# Altium PCB Memory_Proto.PcbDoc
Units mil, origin at the board's own origin, x right, y up, seen from the top; angles counter-clockwise.
Board outline 5200 x 2300 mil, 2 copper layers (Top Layer, Bottom Layer), stack 61.756 mil thick; 3 components, 38 nets, 1008 pads, 0 vias.
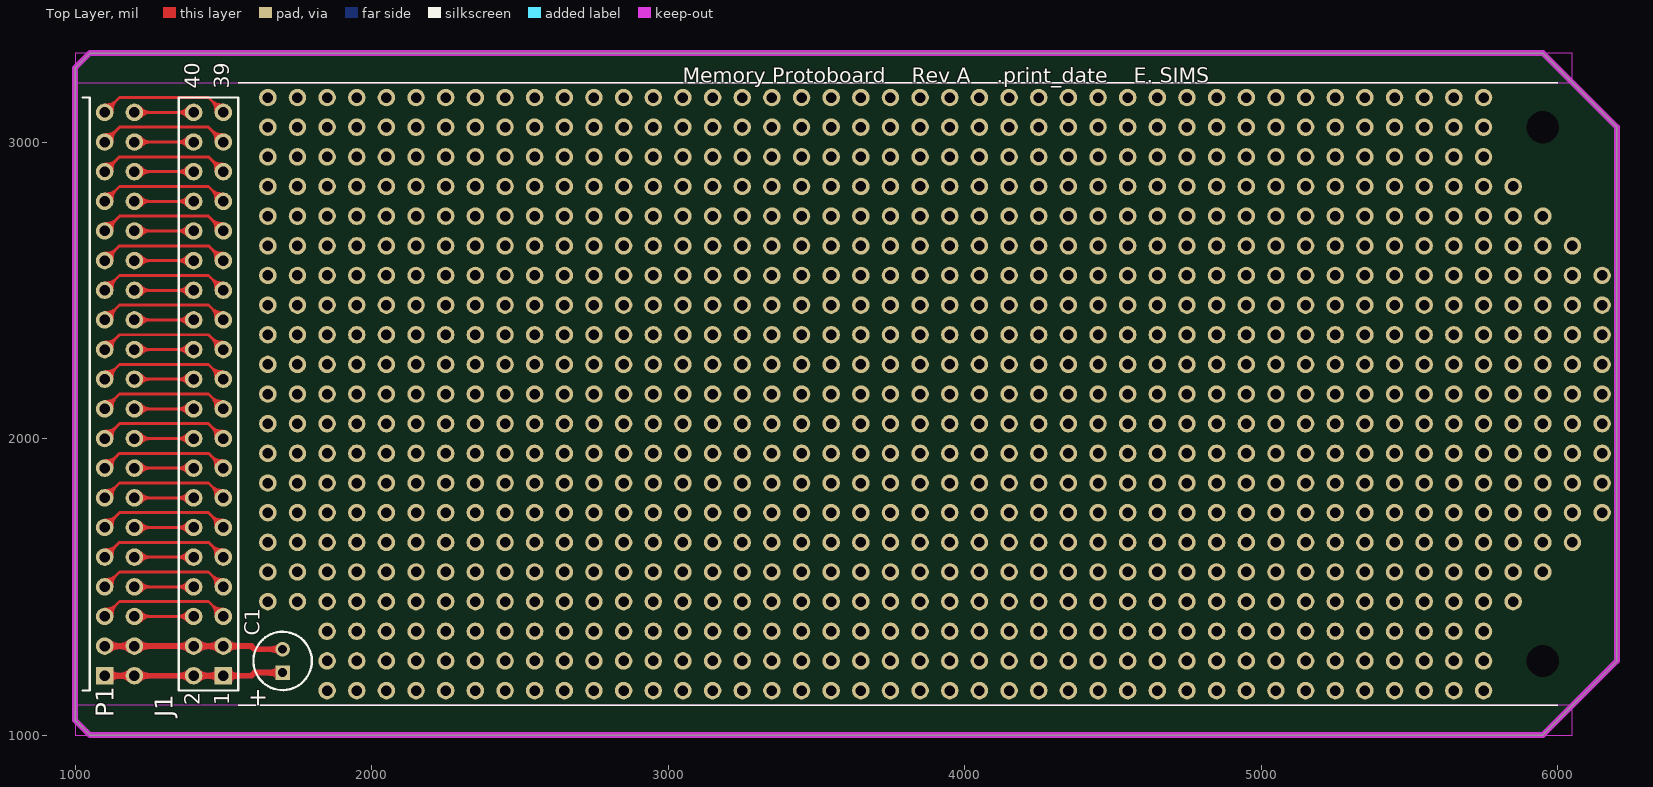
[diagram p0: Top Layer view]
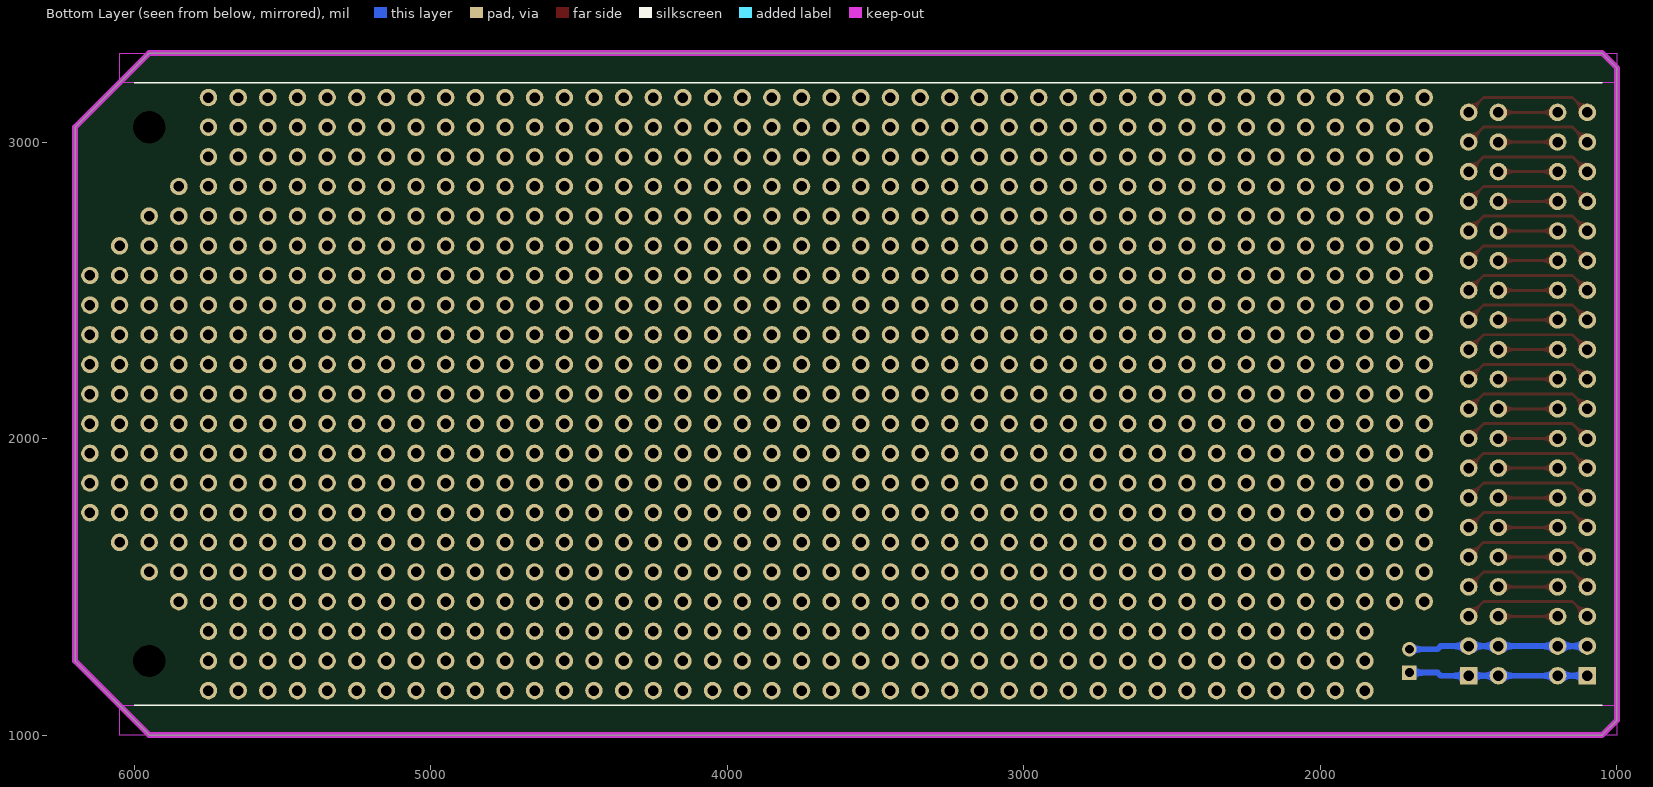
[diagram p1: Bottom Layer view, seen from below]

## Layer stack, top to bottom
Top Solder: solder mask 1, SM-001, Dk 4
Top Layer: signal copper 1.378
Dielectric 1: core 59, Core-043, Dk 4.3
Bottom Layer: signal copper 1.378
Bottom Solder: solder mask 1, SM-001, Dk 4

## Board outline
6200,3050 5950,3300 1050,3300 1000,3250 1000,1050 1050,1000 5950,1000 6200,1250

## Design rules (kind name [scope] priority, off if disabled: settings)
Clearance [All] p1: gap=10 ignorepadtopadclearanceinfootprint=FALSE except(0: Arc-Hole Track-Hole SMDPad-Hole THPad-Hole Via-Hole Fill-Hole Poly-Hole Region-Hole Text-Hole)
HoleSize [All] p1: absolutevalues=TRUE maxlimit=150 minlimit=10 maxpercent=80.000 minpercent=20.000
PolygonConnect [All] p1: connectstyle=Relief reliefconductorwidth=10 reliefentries=4 polygonreliefangle="90 Angle" airgapwidth=10
RoutingVias "Schematic Routing Via Style" [InNetClass('PWR')] p1: holewidth=20 width=35 viastyle="Through Hole" minholewidth=20 minwidth=35 maxholewidth=20 maxwidth=50
RoutingVias [InNet('No Net')] p2: holewidth=35.43 width=59.05 viastyle="Through Hole" minholewidth=35.43 minwidth=59.05 maxholewidth=35.43 maxwidth=59.05
SilkToSilkClearance [All] p1: silktosilkclearance=5
SolderMaskExpansion [All] p1: expansion=4 istentingtop=FALSE
Width "Schematic Width Constraint" [InNetClass('PWR')] p1: maxlimit=50 minlimit=20 preferedwidth=20
Width [All] p2: maxlimit=10 minlimit=10 preferedwidth=10
28 further rules are at their usual default settings.

## Classes and differential pairs
net class PWR: GND VCC

## Components (designator, comment, footprint, x,y, rotation, side; value= is the part's Value field where it differs from the comment)
C1 "Cap Pol5" C5x7 1700,1250 r90 top value=10uF
J1 "Header 20X2" HDR2X20 1500,1200 r90 top
P1 "Header 20X2H" HDR2X20H 1100,1200 r90 top locked

## Footprints (in the part's own frame and the unit in brackets; to place one, negate y for a bottom-side part, rotate by r counter-clockwise, add the part's x,y. Pads: shape width x height; smd on the part's side, far side on the other; paste and mask are expansions set on the pad)
C5x7 [mm] "Capacitor; 2 Leads"
  rect 1.25x1.25 hole 0.75: 1(-1,0)
  round 1.25 hole 0.75: 2(1,0)
  silkscreen extent -2.5,-2.5 2.5,2.5, body extent -2.5,-2.5 2.5,2.5, height 7
HDR2X20 [mm] "Connector; Header; 20x2 Position"
  rect 1.5x1.5 hole 0.9: 1(0,0)
  round 1.5 hole 0.9: 2(0,2.54) 3(2.54,0) 4(2.54,2.54) 5(5.08,0) 6(5.08,2.54) 7(7.62,0) 8(7.62,2.54) 9(10.16,0) 10(10.16,2.54) 11(12.7,0) 12(12.7,2.54) 13(15.24,0) 14(15.24,2.54) 15(17.78,0) 16(17.78,2.54) 17(20.32,0) 18(20.32,2.54) 19(22.86,0) 20(22.86,2.54) 21(25.4,0) 22(25.4,2.54) 23(27.94,0) 24(27.94,2.54) 25(30.48,0) 26(30.48,2.54) 27(33.02,0) 28(33.02,2.54) 29(35.56,0) 30(35.56,2.54) 31(38.1,0) 32(38.1,2.54) 33(40.64,0) 34(40.64,2.54) 35(43.18,0) 36(43.18,2.54) 37(45.72,0) 38(45.72,2.54) 39(48.26,0) 40(48.26,2.54)
  silkscreen extent -1.27,-1.27 49.53,3.81
HDR2X20H [mm] "Connector; Header; 20x2 Position; Right Angle"
  rect 1.5x1.5 hole 0.9: 1(0,0)
  round 1.5 hole 0.9: 2(0,-2.54) 3(2.54,0) 4(2.54,-2.54) 5(5.08,0) 6(5.08,-2.54) 7(7.62,0) 8(7.62,-2.54) 9(10.16,0) 10(10.16,-2.54) 11(12.7,0) 12(12.7,-2.54) 13(15.24,0) 14(15.24,-2.54) 15(17.78,0) 16(17.78,-2.54) 17(20.32,0) 18(20.32,-2.54) 19(22.86,0) 20(22.86,-2.54) 21(25.4,0) 22(25.4,-2.54) 23(27.94,0) 24(27.94,-2.54) 25(30.48,0) 26(30.48,-2.54) 27(33.02,0) 28(33.02,-2.54) 29(35.56,0) 30(35.56,-2.54) 31(38.1,0) 32(38.1,-2.54) 33(40.64,0) 34(40.64,-2.54) 35(43.18,0) 36(43.18,-2.54) 37(45.72,0) 38(45.72,-2.54) 39(48.26,0) 40(48.26,-2.54)
  silkscreen extent -1.27,1.27 49.53,1.91

## Part data
C1: "Polarized Capacitor", LatestRevisionDate=17-Jul-2002, LatestRevisionNote="Re-released for DXP Platform.", PackageDescription="Polarized Capacitor; 2 Leads", PackageReference=POLAR0.8, Published=8-Jun-2000, Publisher="Altium Limited"
J1: "Header, 20-Pin, Dual row", LatestRevisionDate=17-Jul-2002, LatestRevisionNote="Re-released for DXP Platform.", Publisher="Altium Limited"
P1: "Header, 20-Pin, Dual row, Right Angle", LatestRevisionDate=17-Jul-2002, LatestRevisionNote="Re-released for DXP Platform.", Publisher="Altium Limited", System=Connector

## Free pads (board coordinates)
  round 59.06 hole 35.43: 0(1650,1450) 0(1650,1550) 0(1650,1650) 0(1650,1750) 0(1650,1850) 0(1650,1950) 0(1650,2050) 0(1650,2150) 0(1650,2250) 0(1650,2350) 0(1650,2450) 0(1650,2550) 0(1650,2650) 0(1650,2750) 0(1650,2850) 0(1650,2950) 0(1650,3050) 0(1650,3150) 0(1750,1450) 0(1750,1550) 0(1750,1650) 0(1750,1750) 0(1750,1850) 0(1750,1950) 0(1750,2050) 0(1750,2150) 0(1750,2250) 0(1750,2350) 0(1750,2450) 0(1750,2550) 0(1750,2650) 0(1750,2750) 0(1750,2850) 0(1750,2950) 0(1750,3050) 0(1750,3150) 0(1850,1150) 0(1850,1250) 0(1850,1350) 0(1850,1450) 0(1850,1550) 0(1850,1650) 0(1850,1750) 0(1850,1850) 0(1850,1950) 0(1850,2050) 0(1850,2150) 0(1850,2250) 0(1850,2350) 0(1850,2450) 0(1850,2550) 0(1850,2650) 0(1850,2750) 0(1850,2850) 0(1850,2950) 0(1850,3050) 0(1850,3150) 0(1950,1150) 0(1950,1250) 0(1950,1350) 0(1950,1450) 0(1950,1550) 0(1950,1650) 0(1950,1750) 0(1950,1850) 0(1950,1950) 0(1950,2050) 0(1950,2150) 0(1950,2250) 0(1950,2350) 0(1950,2450) 0(1950,2550) 0(1950,2650) 0(1950,2750) 0(1950,2850) 0(1950,2950) 0(1950,3050) 0(1950,3150) 0(2050,1150) 0(2050,1250) 0(2050,1350) 0(2050,1450) 0(2050,1550) 0(2050,1650) 0(2050,1750) 0(2050,1850) 0(2050,1950) 0(2050,2050) 0(2050,2150) 0(2050,2250) 0(2050,2350) 0(2050,2450) 0(2050,2550) 0(2050,2650) 0(2050,2750) 0(2050,2850) 0(2050,2950) 0(2050,3050) 0(2050,3150) 0(2150,1150) 0(2150,1250) 0(2150,1350) 0(2150,1450) 0(2150,1550) 0(2150,1650) 0(2150,1750) 0(2150,1850) 0(2150,1950) 0(2150,2050) 0(2150,2150) 0(2150,2250) 0(2150,2350) 0(2150,2450) 0(2150,2550) 0(2150,2650) 0(2150,2750) 0(2150,2850) 0(2150,2950) 0(2150,3050) 0(2150,3150) 0(2250,1150) 0(2250,1250) 0(2250,1350) 0(2250,1450) 0(2250,1550) 0(2250,1650) 0(2250,1750) 0(2250,1850) 0(2250,1950) 0(2250,2050) 0(2250,2150) 0(2250,2250) 0(2250,2350) 0(2250,2450) 0(2250,2550) 0(2250,2650) 0(2250,2750) 0(2250,2850) 0(2250,2950) 0(2250,3050) 0(2250,3150) 0(2350,1150) 0(2350,1250) 0(2350,1350) 0(2350,1450) 0(2350,1550) 0(2350,1650) 0(2350,1750) 0(2350,1850) 0(2350,1950) 0(2350,2050) 0(2350,2150) 0(2350,2250) 0(2350,2350) 0(2350,2450) 0(2350,2550) 0(2350,2650) 0(2350,2750) 0(2350,2850) 0(2350,2950) 0(2350,3050) 0(2350,3150) 0(2450,1150) 0(2450,1250) 0(2450,1350) 0(2450,1450) 0(2450,1550) 0(2450,1650) 0(2450,1750) 0(2450,1850) 0(2450,1950) 0(2450,2050) 0(2450,2150) 0(2450,2250) 0(2450,2350) 0(2450,2450) 0(2450,2550) 0(2450,2650) 0(2450,2750) 0(2450,2850) 0(2450,2950) 0(2450,3050) 0(2450,3150) 0(2550,1150) 0(2550,1250) 0(2550,1350) 0(2550,1450) 0(2550,1550) 0(2550,1650) 0(2550,1750) 0(2550,1850) 0(2550,1950) 0(2550,2050) 0(2550,2150) 0(2550,2250) 0(2550,2350) 0(2550,2450) 0(2550,2550) 0(2550,2650) 0(2550,2750) 0(2550,2850) 0(2550,2950) 0(2550,3050) 0(2550,3150) 0(2650,1150) 0(2650,1250) 0(2650,1350) 0(2650,1450) 0(2650,1550) 0(2650,1650) 0(2650,1750) 0(2650,1850) 0(2650,1950) 0(2650,2050) 0(2650,2150) 0(2650,2250) 0(2650,2350) 0(2650,2450) 0(2650,2550) 0(2650,2650) 0(2650,2750) 0(2650,2850) 0(2650,2950) 0(2650,3050) 0(2650,3150) 0(2750,1150) 0(2750,1250) 0(2750,1350) 0(2750,1450) 0(2750,1550) 0(2750,1650) 0(2750,1750) 0(2750,1850) 0(2750,1950) 0(2750,2050) 0(2750,2150) 0(2750,2250) 0(2750,2350) 0(2750,2450) 0(2750,2550) 0(2750,2650) 0(2750,2750) 0(2750,2850) 0(2750,2950) 0(2750,3050) 0(2750,3150) 0(2850,1150) 0(2850,1250) 0(2850,1350) 0(2850,1450) 0(2850,1550) 0(2850,1650) 0(2850,1750) 0(2850,1850) 0(2850,1950) 0(2850,2050) 0(2850,2150) 0(2850,2250) 0(2850,2350) 0(2850,2450) 0(2850,2550) 0(2850,2650) 0(2850,2750) 0(2850,2850) 0(2850,2950) 0(2850,3050) 0(2850,3150) 0(2950,1150) 0(2950,1250) 0(2950,1350) 0(2950,1450) 0(2950,1550) 0(2950,1650) 0(2950,1750) 0(2950,1850) 0(2950,1950) 0(2950,2050) 0(2950,2150) 0(2950,2250) 0(2950,2350) 0(2950,2450) 0(2950,2550) 0(2950,2650) 0(2950,2750) 0(2950,2850) 0(2950,2950) 0(2950,3050) 0(2950,3150) 0(3050,1150) 0(3050,1250) 0(3050,1350) 0(3050,1450) 0(3050,1550) 0(3050,1650) 0(3050,1750) 0(3050,1850) 0(3050,1950) 0(3050,2050) 0(3050,2150) 0(3050,2250) 0(3050,2350) 0(3050,2450) 0(3050,2550) 0(3050,2650) 0(3050,2750) 0(3050,2850) 0(3050,2950) 0(3050,3050) 0(3050,3150) 0(3150,1150) 0(3150,1250) 0(3150,1350) 0(3150,1450) 0(3150,1550) 0(3150,1650) 0(3150,1750) 0(3150,1850) 0(3150,1950) 0(3150,2050) 0(3150,2150) 0(3150,2250) 0(3150,2350) 0(3150,2450) 0(3150,2550) 0(3150,2650) 0(3150,2750) 0(3150,2850) 0(3150,2950) 0(3150,3050) 0(3150,3150) 0(3250,1150) 0(3250,1250) 0(3250,1350) 0(3250,1450) 0(3250,1550) 0(3250,1650) 0(3250,1750) 0(3250,1850) 0(3250,1950) 0(3250,2050) 0(3250,2150) 0(3250,2250) 0(3250,2350) 0(3250,2450) 0(3250,2550) 0(3250,2650) 0(3250,2750) 0(3250,2850) 0(3250,2950) 0(3250,3050) 0(3250,3150) 0(3350,1150) 0(3350,1250) 0(3350,1350) 0(3350,1450) 0(3350,1550) 0(3350,1650) 0(3350,1750) 0(3350,1850) 0(3350,1950) 0(3350,2050) 0(3350,2150) 0(3350,2250) 0(3350,2350) 0(3350,2450) 0(3350,2550) 0(3350,2650) 0(3350,2750) 0(3350,2850) 0(3350,2950) 0(3350,3050) 0(3350,3150) 0(3450,1150) 0(3450,1250) 0(3450,1350) 0(3450,1450) 0(3450,1550) 0(3450,1650) 0(3450,1750) 0(3450,1850) 0(3450,1950) 0(3450,2050) 0(3450,2150) 0(3450,2250) 0(3450,2350) 0(3450,2450) 0(3450,2550) 0(3450,2650) 0(3450,2750) 0(3450,2850) 0(3450,2950) 0(3450,3050) 0(3450,3150) 0(3550,1150) 0(3550,1250) 0(3550,1350) 0(3550,1450) 0(3550,1550) 0(3550,1650) 0(3550,1750) 0(3550,1850) 0(3550,1950) 0(3550,2050) 0(3550,2150) 0(3550,2250) 0(3550,2350) 0(3550,2450) 0(3550,2550) 0(3550,2650) 0(3550,2750) 0(3550,2850) 0(3550,2950) 0(3550,3050) 0(3550,3150) 0(3650,1150) 0(3650,1250) 0(3650,1350) 0(3650,1450) 0(3650,1550) 0(3650,1650) 0(3650,1750) 0(3650,1850) 0(3650,1950) 0(3650,2050) 0(3650,2150) 0(3650,2250) 0(3650,2350) 0(3650,2450) 0(3650,2550) 0(3650,2650) 0(3650,2750) 0(3650,2850) 0(3650,2950) 0(3650,3050) 0(3650,3150) 0(3750,1150) 0(3750,1250) 0(3750,1350) 0(3750,1450) 0(3750,1550) 0(3750,1650) 0(3750,1750) 0(3750,1850) 0(3750,1950) 0(3750,2050) 0(3750,2150) 0(3750,2250) 0(3750,2350) 0(3750,2450) 0(3750,2550) 0(3750,2650) 0(3750,2750) 0(3750,2850) 0(3750,2950) 0(3750,3050) 0(3750,3150) 0(3850,1150) 0(3850,1250) 0(3850,1350) 0(3850,1450) 0(3850,1550) 0(3850,1650) 0(3850,1750) 0(3850,1850) 0(3850,1950) 0(3850,2050) 0(3850,2150) 0(3850,2250) 0(3850,2350) 0(3850,2450) 0(3850,2550) 0(3850,2650) 0(3850,2750) 0(3850,2850) 0(3850,2950) 0(3850,3050) 0(3850,3150) 0(3950,1150) 0(3950,1250) 0(3950,1350) 0(3950,1450) 0(3950,1550) 0(3950,1650) 0(3950,1750) 0(3950,1850) 0(3950,1950) 0(3950,2050) 0(3950,2150) 0(3950,2250) 0(3950,2350) 0(3950,2450) 0(3950,2550) 0(3950,2650) 0(3950,2750) 0(3950,2850) 0(3950,2950) 0(3950,3050) 0(3950,3150) 0(4050,1150) 0(4050,1250) 0(4050,1350) 0(4050,1450) 0(4050,1550) 0(4050,1650) 0(4050,1750) 0(4050,1850) 0(4050,1950) 0(4050,2050) 0(4050,2150) 0(4050,2250) 0(4050,2350) 0(4050,2450) 0(4050,2550) 0(4050,2650) 0(4050,2750) 0(4050,2850) 0(4050,2950) 0(4050,3050) 0(4050,3150) 0(4150,1150) 0(4150,1250) 0(4150,1350) 0(4150,1450) 0(4150,1550) 0(4150,1650) 0(4150,1750) 0(4150,1850) 0(4150,1950) 0(4150,2050) 0(4150,2150) 0(4150,2250) 0(4150,2350) 0(4150,2450) 0(4150,2550) 0(4150,2650) 0(4150,2750) 0(4150,2850) 0(4150,2950) 0(4150,3050) 0(4150,3150) 0(4250,1150) 0(4250,1250) 0(4250,1350) 0(4250,1450) 0(4250,1550) 0(4250,1650) 0(4250,1750) 0(4250,1850) 0(4250,1950) 0(4250,2050) 0(4250,2150) 0(4250,2250) 0(4250,2350) 0(4250,2450) 0(4250,2550) 0(4250,2650) 0(4250,2750) 0(4250,2850) 0(4250,2950) 0(4250,3050) 0(4250,3150) 0(4350,1150) 0(4350,1250) 0(4350,1350) 0(4350,1450) 0(4350,1550) 0(4350,1650) 0(4350,1750) 0(4350,1850) 0(4350,1950) 0(4350,2050) 0(4350,2150) 0(4350,2250) 0(4350,2350) 0(4350,2450) 0(4350,2550) 0(4350,2650) 0(4350,2750) 0(4350,2850) 0(4350,2950) 0(4350,3050) 0(4350,3150) 0(4450,1150) 0(4450,1250) 0(4450,1350) 0(4450,1450) 0(4450,1550) 0(4450,1650) 0(4450,1750) 0(4450,1850) 0(4450,1950) 0(4450,2050) 0(4450,2150) 0(4450,2250) 0(4450,2350) 0(4450,2450) 0(4450,2550) 0(4450,2650) 0(4450,2750) 0(4450,2850) 0(4450,2950) 0(4450,3050) 0(4450,3150) 0(4550,1150) 0(4550,1250) 0(4550,1350) 0(4550,1450) 0(4550,1550) 0(4550,1650) 0(4550,1750) 0(4550,1850) 0(4550,1950) 0(4550,2050) 0(4550,2150) 0(4550,2250) 0(4550,2350) 0(4550,2450) 0(4550,2550) 0(4550,2650) 0(4550,2750) 0(4550,2850) 0(4550,2950) 0(4550,3050) 0(4550,3150) 0(4650,1150) 0(4650,1250) 0(4650,1350) 0(4650,1450) 0(4650,1550) 0(4650,1650) 0(4650,1750) 0(4650,1850) 0(4650,1950) 0(4650,2050) 0(4650,2150) 0(4650,2250) 0(4650,2350) 0(4650,2450) 0(4650,2550) 0(4650,2650) 0(4650,2750) 0(4650,2850) 0(4650,2950) 0(4650,3050) 0(4650,3150) 0(4750,1150) 0(4750,1250) 0(4750,1350) 0(4750,1450) 0(4750,1550) 0(4750,1650) 0(4750,1750) 0(4750,1850) 0(4750,1950) 0(4750,2050) 0(4750,2150) 0(4750,2250) 0(4750,2350) 0(4750,2450) 0(4750,2550) 0(4750,2650) 0(4750,2750) 0(4750,2850) 0(4750,2950) 0(4750,3050) 0(4750,3150) 0(4850,1150) 0(4850,1250) 0(4850,1350) 0(4850,1450) 0(4850,1550) 0(4850,1650) 0(4850,1750) 0(4850,1850) 0(4850,1950) 0(4850,2050) 0(4850,2150) 0(4850,2250) 0(4850,2350) 0(4850,2450) 0(4850,2550) 0(4850,2650) 0(4850,2750) 0(4850,2850) 0(4850,2950) 0(4850,3050) 0(4850,3150) 0(4950,1150) 0(4950,1250) 0(4950,1350) 0(4950,1450) 0(4950,1550) 0(4950,1650) 0(4950,1750) 0(4950,1850) 0(4950,1950) 0(4950,2050) 0(4950,2150) 0(4950,2250) 0(4950,2350) 0(4950,2450) 0(4950,2550) 0(4950,2650) 0(4950,2750) 0(4950,2850) 0(4950,2950) 0(4950,3050) 0(4950,3150) 0(5050,1150) 0(5050,1250) 0(5050,1350) 0(5050,1450) 0(5050,1550) 0(5050,1650) 0(5050,1750) 0(5050,1850) 0(5050,1950) 0(5050,2050) 0(5050,2150) 0(5050,2250) 0(5050,2350) 0(5050,2450) 0(5050,2550) 0(5050,2650) 0(5050,2750) 0(5050,2850) 0(5050,2950) 0(5050,3050) 0(5050,3150) 0(5150,1150) 0(5150,1250) 0(5150,1350) 0(5150,1450) 0(5150,1550) 0(5150,1650) 0(5150,1750) 0(5150,1850) 0(5150,1950) 0(5150,2050) 0(5150,2150) 0(5150,2250) 0(5150,2350) 0(5150,2450) 0(5150,2550) 0(5150,2650) 0(5150,2750) 0(5150,2850) 0(5150,2950) 0(5150,3050) 0(5150,3150) 0(5250,1150) 0(5250,1250) 0(5250,1350) 0(5250,1450) 0(5250,1550) 0(5250,1650) 0(5250,1750) 0(5250,1850) 0(5250,1950) 0(5250,2050) 0(5250,2150) 0(5250,2250) 0(5250,2350) 0(5250,2450) 0(5250,2550) 0(5250,2650) 0(5250,2750) 0(5250,2850) 0(5250,2950) 0(5250,3050) 0(5250,3150) 0(5350,1150) 0(5350,1250) 0(5350,1350) 0(5350,1450) 0(5350,1550) 0(5350,1650) 0(5350,1750) 0(5350,1850) 0(5350,1950) 0(5350,2050) 0(5350,2150) 0(5350,2250) 0(5350,2350) 0(5350,2450) 0(5350,2550) 0(5350,2650) 0(5350,2750) 0(5350,2850) 0(5350,2950) 0(5350,3050) 0(5350,3150) 0(5450,1150) 0(5450,1250) 0(5450,1350) 0(5450,1450) 0(5450,1550) 0(5450,1650) 0(5450,1750) 0(5450,1850) 0(5450,1950) 0(5450,2050) 0(5450,2150) 0(5450,2250) 0(5450,2350) 0(5450,2450) 0(5450,2550) 0(5450,2650) 0(5450,2750) 0(5450,2850) 0(5450,2950) 0(5450,3050) 0(5450,3150) 0(5550,1150) 0(5550,1250) 0(5550,1350) 0(5550,1450) 0(5550,1550) 0(5550,1650) 0(5550,1750) 0(5550,1850) 0(5550,1950) 0(5550,2050) 0(5550,2150) 0(5550,2250) 0(5550,2350) 0(5550,2450) 0(5550,2550) 0(5550,2650) 0(5550,2750) 0(5550,2850) 0(5550,2950) 0(5550,3050) 0(5550,3150) 0(5650,1150) 0(5650,1250) 0(5650,1350) 0(5650,1450) 0(5650,1550) 0(5650,1650) 0(5650,1750) 0(5650,1850) 0(5650,1950) 0(5650,2050) 0(5650,2150) 0(5650,2250) 0(5650,2350) 0(5650,2450) 0(5650,2550) 0(5650,2650) 0(5650,2750) 0(5650,2850) 0(5650,2950) 0(5650,3050) 0(5650,3150) 0(5750,1150) 0(5750,1250) 0(5750,1350) 0(5750,1450) 0(5750,1550) 0(5750,1650) 0(5750,1750) 0(5750,1850) 0(5750,1950) 0(5750,2050) 0(5750,2150) 0(5750,2250) 0(5750,2350) 0(5750,2450) 0(5750,2550) 0(5750,2650) 0(5750,2750) 0(5750,2850) 0(5750,2950) 0(5750,3050) 0(5750,3150) 0(5850,1450) 0(5850,1550) 0(5850,1650) 0(5850,1750) 0(5850,1850) 0(5850,1950) 0(5850,2050) 0(5850,2150) 0(5850,2250) 0(5850,2350) 0(5850,2450) 0(5850,2550) 0(5850,2650) 0(5850,2750) 0(5850,2850) 0(5950,1550) 0(5950,1650) 0(5950,1750) 0(5950,1850) 0(5950,1950) 0(5950,2050) 0(5950,2150) 0(5950,2250) 0(5950,2350) 0(5950,2450) 0(5950,2550) 0(5950,2650) 0(5950,2750) 0(6050,1650) 0(6050,1750) 0(6050,1850) 0(6050,1950) 0(6050,2050) 0(6050,2150) 0(6050,2250) 0(6050,2350) 0(6050,2450) 0(6050,2550) 0(6050,2650) 0(6150,1750) 0(6150,1850) 0(6150,1950) 0(6150,2050) 0(6150,2150) 0(6150,2250) 0(6150,2350) 0(6150,2450) 0(6150,2550)
  round 0 hole 109: ""(5950,1250) ""(5950,3050)

## Nets (pads, with @x,y where several pads share a name; then routed paths per layer and width w, separated by ;. In a path a pad name is that pad's centre, name@x,y a point inside that pad or via, vN(x,y) a via of type N, cw(c..) or ccw(c..) an arc to the next point about the centre after c; other vN are vias at no path point)
ADDR0: J1.6 P1.6 | length 200
  Top Layer w10: P1.6 J1.6
ADDR1: J1.8 P1.8 | length 200
  Top Layer w10: P1.8 J1.8
ADDR2: J1.10 P1.10 | length 200
  Top Layer w10: P1.10 J1.10
ADDR3: J1.12 P1.12 | length 200
  Top Layer w10: P1.12 J1.12
ADDR4: J1.14 P1.14 | length 200
  Top Layer w10: P1.14 J1.14
ADDR5: J1.16 P1.16 | length 200
  Top Layer w10: P1.16 J1.16
ADDR6: J1.18 P1.18 | length 200
  Top Layer w10: P1.18 J1.18
ADDR7: J1.20 P1.20 | length 200
  Top Layer w10: P1.20 J1.20
ADDR8: J1.22 P1.22 | length 200
  Top Layer w10: P1.22 J1.22
ADDR9: J1.24 P1.24 | length 200
  Top Layer w10: P1.24 J1.24
ADDR10: J1.26 P1.26 | length 200
  Top Layer w10: P1.26 J1.26
ADDR11: J1.28 P1.28 | length 200
  Top Layer w10: P1.28 J1.28
ADDR12: J1.30 P1.30 | length 200
  Top Layer w10: P1.30 J1.30
ADDR13: J1.32 P1.32 | length 200
  Top Layer w10: P1.32 J1.32
ADDR14: J1.34 P1.34 | length 200
  Top Layer w10: P1.34 J1.34
ADDR15: J1.36 P1.36 | length 200
  Top Layer w10: P1.36 J1.36
ADDR16: J1.38 P1.38 | length 200
  Top Layer w10: P1.38 J1.38
ADDR17: J1.40 P1.40 | length 200
  Top Layer w10: P1.40 J1.40
ADDR18: J1.21 P1.21 | length 441.4
  Top Layer w10: P1.21 1150,2250 1450,2250 J1.21
ADDR19: J1.23 P1.23 | length 441.4
  Top Layer w10: P1.23 1150,2350 1450,2350 J1.23
BUS0: J1.5 P1.5 | length 441.4
  Top Layer w10: P1.5 1150,1450 1450,1450 J1.5
BUS1: J1.7 P1.7 | length 441.4
  Top Layer w10: P1.7 1150,1550 1450,1550 J1.7
BUS2: J1.9 P1.9 | length 441.4
  Top Layer w10: P1.9 1150,1650 1450,1650 J1.9
BUS3: J1.11 P1.11 | length 441.4
  Top Layer w10: P1.11 1150,1750 1450,1750 J1.11
BUS4: J1.13 P1.13 | length 441.4
  Top Layer w10: P1.13 1150,1850 1450,1850 J1.13
BUS5: J1.15 P1.15 | length 441.4
  Top Layer w10: P1.15 1150,1950 1450,1950 J1.15
BUS6: J1.17 P1.17 | length 441.4
  Top Layer w10: P1.17 1150,2050 1450,2050 J1.17
BUS7: J1.19 P1.19 | length 441.4
  Top Layer w10: P1.19 1150,2150 1450,2150 J1.19
CLK: J1.37 P1.37 | length 441.4
  Top Layer w10: P1.37 1150,3050 1450,3050 J1.37
EN: J1.39 P1.39 | length 441.4
  Top Layer w10: P1.39 1150,3150 1450,3150 J1.39
GND: C1.2 J1.3 J1.4 P1.3 P1.4 | length 1208.8
  Top Layer w20: P1.3 P1.4 J1.4 J1.3 1594.69,1300 1605.32,1289.37 C1.2
  Bottom Layer w20: P1.3 P1.4 J1.4 J1.3 1594.69,1300 1605.32,1289.37 C1.2
LOAD: J1.33 P1.33 | length 441.4
  Top Layer w10: P1.33 1150,2850 1450,2850 J1.33
O\U\T\: J1.31 P1.31 | length 441.4
  Top Layer w10: P1.31 1150,2750 1450,2750 J1.31
RFU_M25: J1.25 P1.25 | length 441.4
  Top Layer w10: P1.25 1150,2450 1450,2450 J1.25
RFU_M27: J1.27 P1.27 | length 441.4
  Top Layer w10: P1.27 1150,2550 1450,2550 J1.27
RFU_M29: J1.29 P1.29 | length 441.4
  Top Layer w10: P1.29 1150,2650 1450,2650 J1.29
RST: J1.35 P1.35 | length 441.4
  Top Layer w10: P1.35 1150,2950 1450,2950 J1.35
VCC: C1.1 J1.1 J1.2 P1.1 P1.2 | length 1208.8
  Top Layer w20: P1.1 P1.2 J1.2 J1.1 1594.68,1200 1605.31,1210.63 C1.1
  Bottom Layer w20: P1.1 P1.2 J1.2 J1.1 1594.68,1200 1605.31,1210.63 C1.1

## Keep-outs
Top Layer:
  rectangle: 1000,1000 6050,1100
  rectangle: 1000,3200 6050,3300
Bottom Layer:
  rectangle: 1000,1000 6050,1100
  rectangle: 1000,3200 6050,3300
Keep-Out Layer:
  the board outline again, w20

## Silkscreen, mask and mechanical layers (free items; w line width, h text height)
Top Overlay:
  lines w5: 1550,1100 6000,1100 ; 1550,3200 6000,3200
  text "Memory Protoboard    Rev A    .print_date    E. SIMS" at 3050,3200 h50
Bottom Overlay:
  lines w5: 1050,1100 6000,1100 ; 1050,3200 6000,3200

## Text inside footprints (layer, text, board x,y; h text height)
C1: Top Overlay "+" at 1592.61,1158.89 h59.06 r270
J1: Top Overlay "1" at 1520,1100 h50 r90; Top Overlay "2" at 1420,1100 h50 r90; Top Overlay "40" at 1420,3180 h50 r90; Top Overlay "39" at 1520,3180 h50 r90